# Altium PCB pcb.PcbDoc
Units mm, origin at the board's own origin, x right, y up, seen from the top; angles counter-clockwise.
Board outline 81.53 x 56.15 mm, 2 copper layers (Top Layer, Bottom Layer); 20 components, 17 nets, 115 pads, 0 vias.
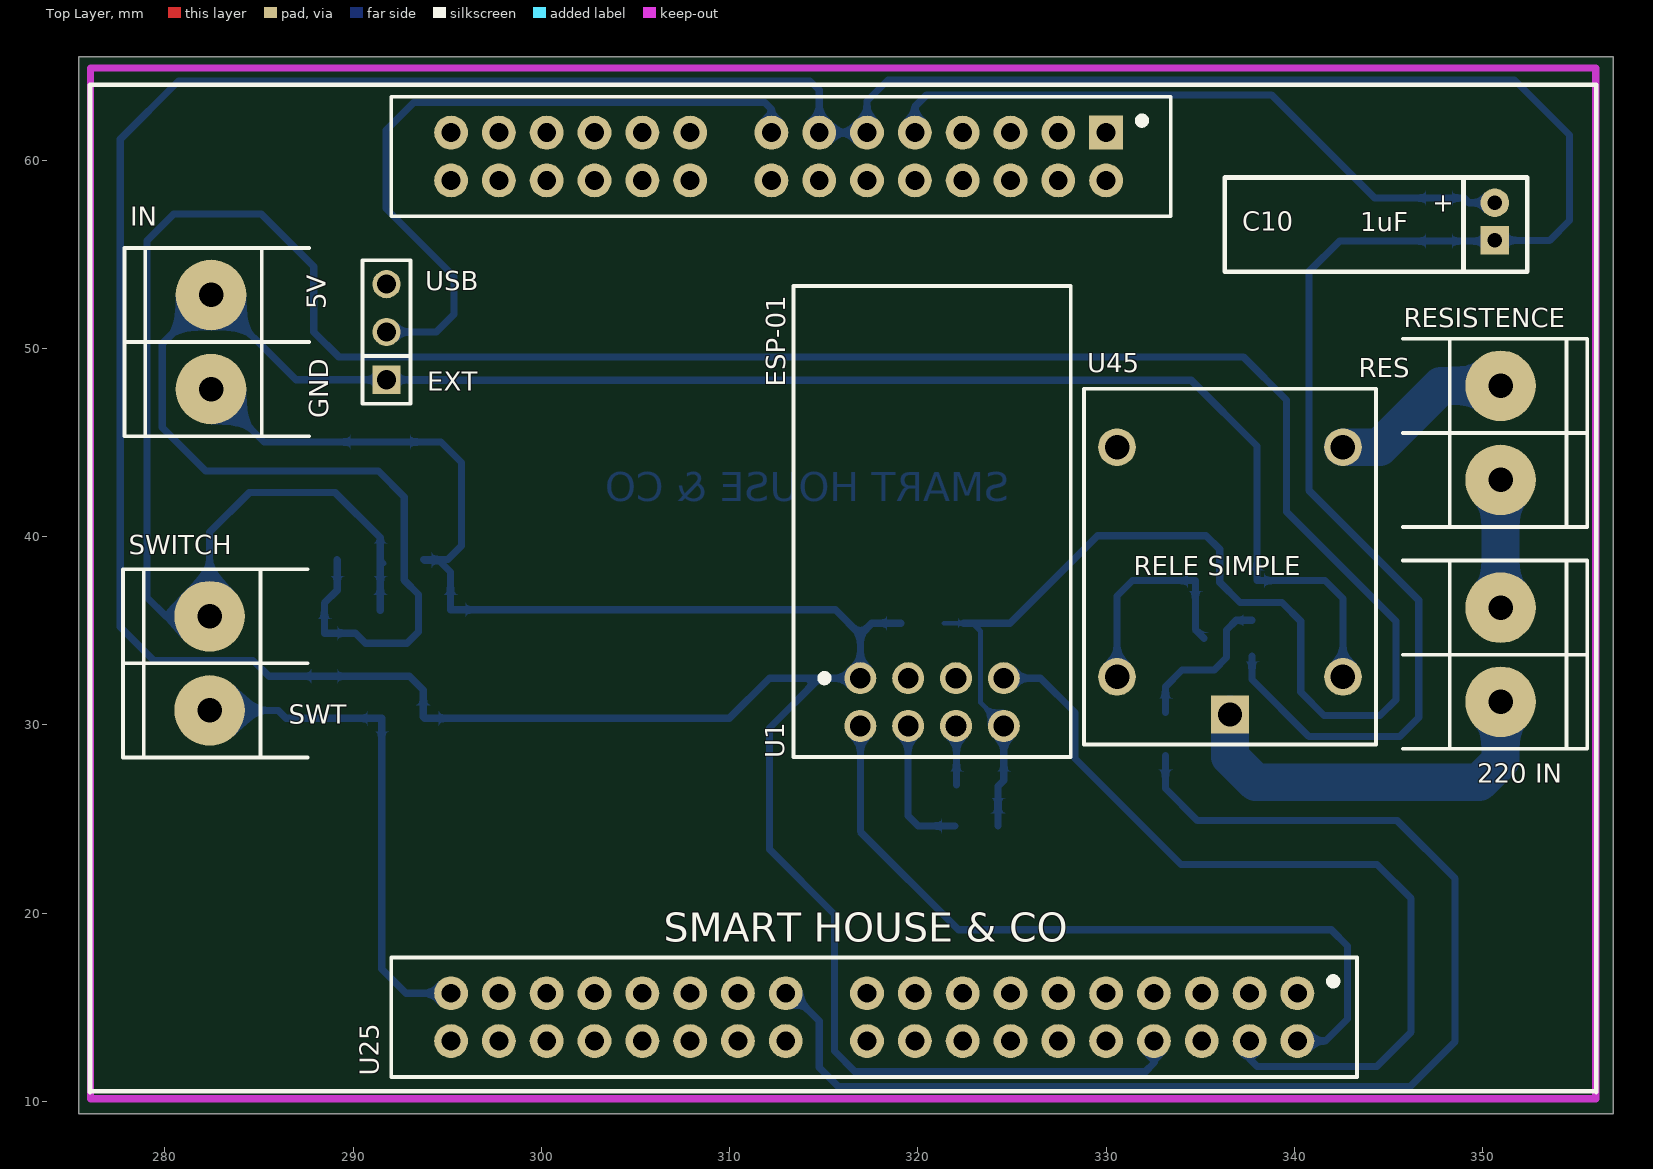
[diagram p0: Top Layer view]
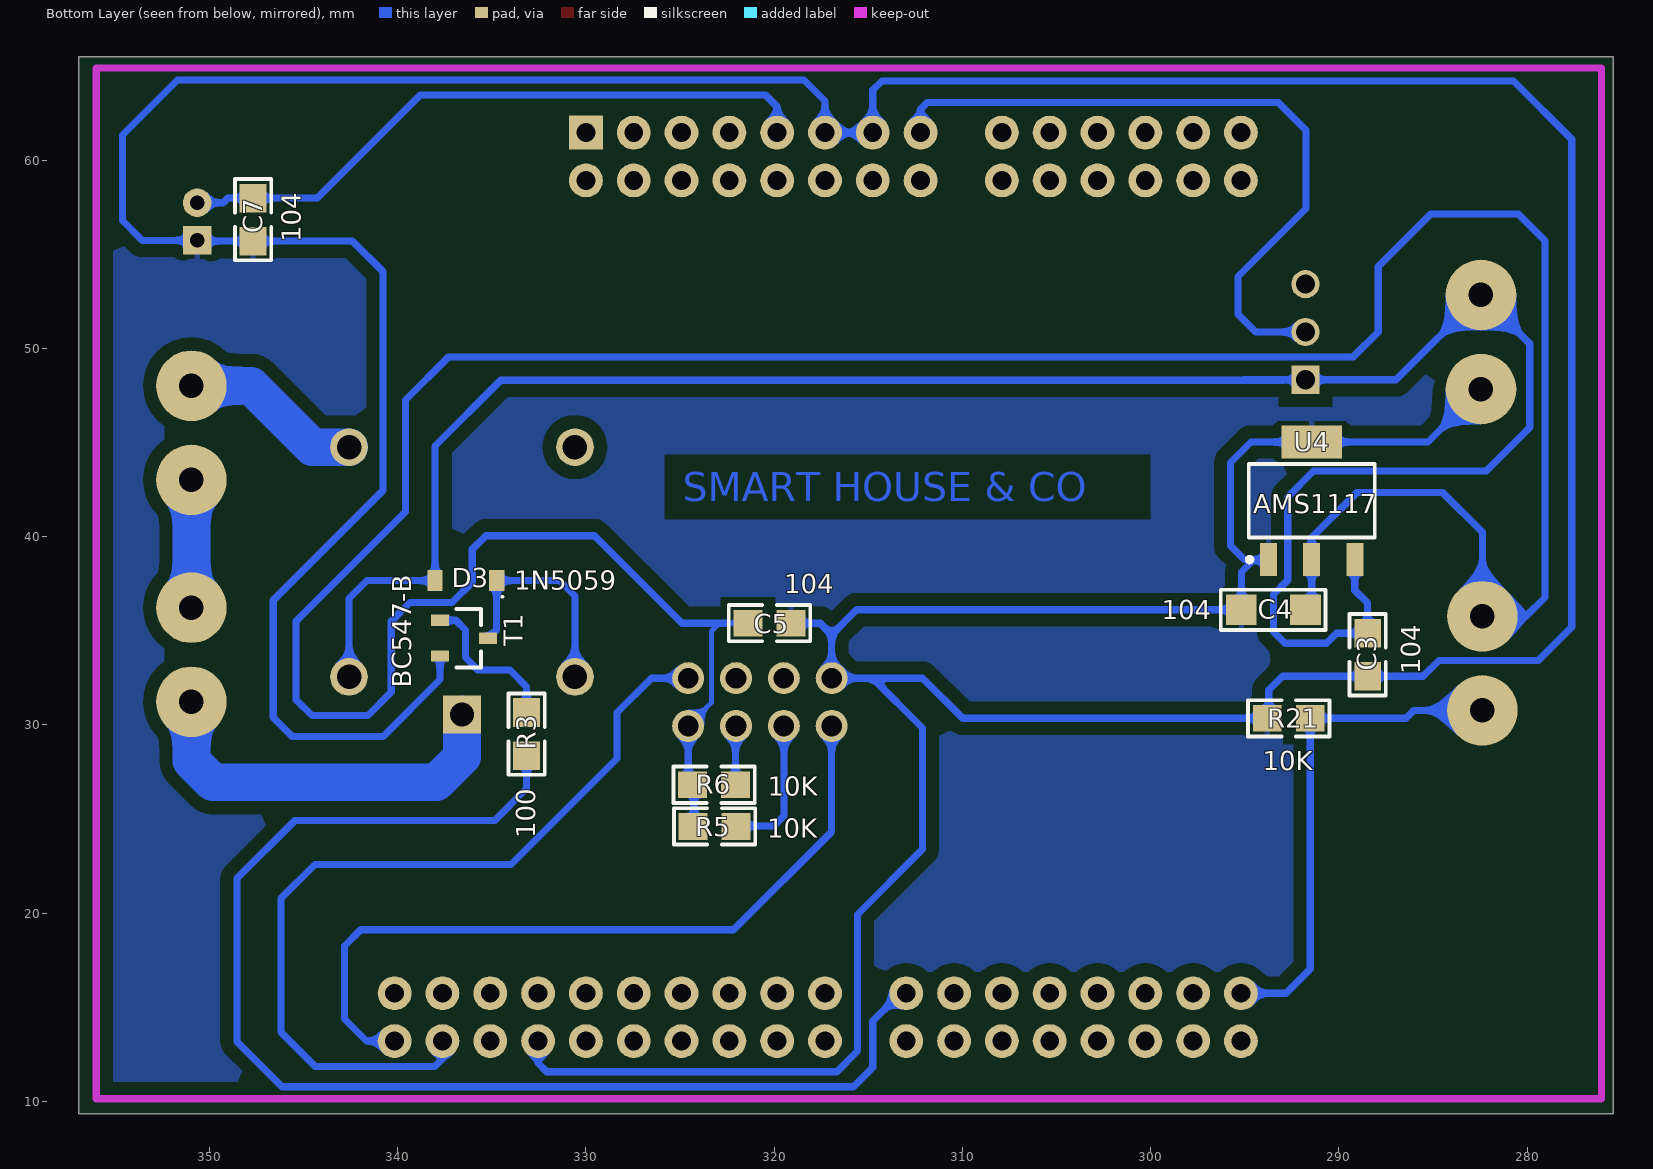
[diagram p1: Bottom Layer view, seen from below]

## Layer stack, top to bottom
Top Solder: solder mask 0.0102, Solder Resist, Dk 3.5
Top Layer: signal copper 0.0356
Dielectric 1: dielectric 0.32, FR-4, Dk 4.8
Bottom Layer: signal copper 0.0356
Bottom Solder: solder mask 0.0102, Solder Resist, Dk 3.5

## Board outline
275.412,9.358 275.412,65.507 356.946,65.507 356.946,9.358

## Design rules (kind name [scope] priority, off if disabled: settings)
Clearance POLYGON [All vs InPolygon] p1: gap=0.7
Clearance [All] p2: gap=0.254
PolygonConnect [All] p1: connectstyle=Relief reliefconductorwidth=0.254 reliefentries=4 polygonreliefangle="90 Angle" airgapwidth=0.254
RoutingVias [All] p1: holewidth=0.711 width=1.27 viastyle="Through Hole" minholewidth=0.711 minwidth=1.27 maxholewidth=0.711 maxwidth=1.27
SolderMaskExpansion [All] p1: expansion=0.102
UnpouredPolygon [All] p1: allowunpoured=FALSE
Width [All] p1: maxlimit=2 minlimit=0.254 preferedwidth=0.381 toplayer_maxwidth=0.508 minimp=50.000000 maximp=50.000000 favimp=50.000000
29 further rules are at their usual default settings.

## Classes and differential pairs
component class esq: C3 C4 C5 C7 C10 D3 R3 R5 R6 R21 T1 U1 U4 U25 U45 ""

## Components (designator, comment, footprint, x,y, rotation, side; value= is the part's Value field where it differs from the comment)
C3 "104" 0805 288.468,33.731 r270 bottom
C4 "104" 1206 293.472,36.119 r0 bottom
C5 "104" 0805 320.243,35.408 r0 bottom
C7 "104" 0805 347.675,56.845 r90 bottom
C10 "1uF" CAP100RP 350.647,56.744 r270 top
D3 "1N5059" Diodo 336.372,37.668 r0 bottom
J1 "RESISTENCE" BORNERA2 350.952,45.517 r180 top
J2 "IN" BORNERA2 282.448,50.343 r0 top
J20 "" JUMPER3 291.77,50.876 r90 top
J21 "SWITCH" BORNERA2 282.372,33.274 r0 top
J26 "220 IN" BORNERA2 350.952,33.731 r180 top
R3 "100" 0805 333.146,29.515 r270 bottom
R5 "10K" 0805 323.164,24.613 r180 bottom
R6 "10K" 0805 323.19,26.822 r180 bottom
R21 "10K" 0805 292.659,30.353 r0 bottom
T1 "BC547-B" SOT23 337.744,35.56 r270 bottom
U1 "ESP-01" ESP-01 316.941,29.947 r0 top
U4 "AMS1117" AMS1117 291.44,41.91 r90 bottom
U25 "FRDM-KL25Z" MICRO 316.154,38.227 r180 top
U45 "RELE SIMPLE" "RELE SERIE 943" 328.828,28.956 r90 top (schematic designator *1)

## Footprints (in the part's own frame and the unit in brackets; to place one, negate y for a bottom-side part, rotate by r counter-clockwise, add the part's x,y. Pads: shape width x height; smd on the part's side, far side on the other; paste and mask are expansions set on the pad)
0805 [mil] "Pasivo 0805"
  rect 60x56 smd: 1(-45,0) 2(45,0)
  silkscreen extent -85,-38 85,38, body extent -39,-25 39,25, height 15
1206 [mil] "Pasivo 1206"
  rect 64x64 smd: 1(-67,0) 2(67,0)
  silkscreen extent -109,-42 110,42, body extent -62,-32 63,31, height 20
AMS1117 [mm] "SOT223, 4-Leads, Body 6,50x7,00mm (avg), Pitch 2,30mm, IPC Medium Density"
  rect 1.75x0.9 smd: 1(-3.125,-2.3) 2(-3.125,2.3) 3(-3.125,0)
  rect 1.75x3.2 smd: 2(3.125,0)
  silkscreen extent -3.25,-3.35 1.95,3.43, body extent -3.48,-3.25 3.48,3.25, height 1.7
BORNERA2 [mm] "Bornera con Tornillos 5mm separaci�n"
  round 3.75 hole 1.3: 1(0,2.5) 2(0,-2.5)
  silkscreen extent -4.6,-5 5.2,5, body extent -3.76,-4.89 3.94,5.61, height 10
CAP100RP [mil] "Body diameter 5mm"
  round 60 hole 30: 1(-39.37,0)
  rect 60x60 hole 30: 2(39.37,0)
  silkscreen extent -92,-565 105,68, body extent -97,-566 107,-65, height 220
Diodo [mm] "SODFL, 2-Leads, Body 1,60x3,60mm, IPC Medium Density"
  rect 0.81x1.12 smd: 1(-1.635,0) 2(1.635,0)
  silkscreen extent -1.99,0.81 -1.89,0.91, body extent -1.4,-0.85 1.4,0.85, height 1.3
ESP-01 [mm]
  round 1.7 hole 1.1: 1(0,2.54) 2(2.54,2.54) 3(5.08,2.54) 4(7.62,2.54) 5(0,0) 6(2.54,0) 7(5.08,0) 8(7.62,0)
  silkscreen extent -3.56,-1.65 11.18,23.37, body extent -3.43,-1.52 11.07,23.28, height 14.88
JUMPER3 [mm]
  rect 1.5x1.5 hole 1.016: 1(-2.54,0)
  round 1.5 hole 1.016: 2(0,0) 3(2.54,0)
  silkscreen extent -3.81,-1.27 3.81,1.27, body extent -3.81,-1.3 3.81,1.27, height 16.15
MICRO [mm]
  rect 1.8x1.8 hole 1: 1(-13.843,-23.241)
  round 1.8 hole 1: 2(-13.843,-20.701) 3(-11.303,-23.241) 4(-11.303,-20.701) 5(-8.763,-23.241) 6(-8.763,-20.701) 7(-6.223,-23.241) 8(-6.223,-20.701) 9(-3.683,-23.241) 10(-3.683,-20.701) 11(-1.143,-23.241) 12(-1.143,-20.701) 13(1.397,-23.241) 14(1.397,-20.701) 15(3.937,-23.241) 16(3.937,-20.701) 17(8.255,-23.241) 18(8.255,-20.701) 19(10.795,-23.241) 20(10.795,-20.701) 21(13.335,-23.241) 22(13.335,-20.701) 23(15.875,-23.241) 24(15.875,-20.701) 25(18.415,-23.241) 26(18.415,-20.701) 27(20.955,-23.241) 28(20.955,-20.701) 29(-24.003,22.479) 30(-24.003,25.019) 31(-21.463,22.479) 32(-21.463,25.019) 33(-18.923,22.479) 34(-18.923,25.019) 35(-16.383,22.479) 36(-16.383,25.019) 37(-13.843,22.479) 38(-13.843,25.019) 39(-11.303,22.479) 40(-11.303,25.019) 41(-8.763,22.479) 42(-8.763,25.019) 43(-6.223,22.479) 44(-6.223,25.019) 45(-3.683,22.479) 46(-3.683,25.019) 47(-1.143,22.479) 48(-1.143,25.019) 49(3.175,22.479) 50(3.175,25.019) 51(5.715,22.479) 52(5.715,25.019) 53(8.255,22.479) 54(8.255,25.019) 55(10.795,22.479) 56(10.795,25.019) 57(13.335,22.479) 58(13.335,25.019) 59(15.875,22.479) 60(15.875,25.019) 61(18.415,22.479) 62(18.415,25.019) 63(20.955,22.479) 64(20.955,25.019)
  silkscreen extent -39.88,-25.78 40.13,27.72, body extent -25.27,-24.51 22.23,26.29, height 1.5
"RELE SERIE 943" [mm]
  round 2 hole 1.3: B1(3.6,-13.75) B2(3.6,-1.75) NA1(15.8,-13.75) NC1(15.8,-1.75)
  rect 2x2 hole 1.3: C1(1.6,-7.75)
  silkscreen extent 0,-15.5 18.9,0
SOT23 [mm]
  rect 0.6x0.95 smd: 1(0,0) 2(0.95,2.55) 3(1.9,0)
  silkscreen extent -0.6,0.87 2.5,2.18, body extent -0.53,-0.25 2.47,2.88, height 1

## Part data
C3 C4 C5 C7: library part CAP, "cap"
C10: library part CAPPOL, "Cap polarizado"
D3: library part "DIODO SCHOTTKY", "Diodo"
J1 J2 J21 J26: library part Bornera_2, "Bornera de 2 pines"
J20: library part JUMPER3
R3 R5 R6 R21: library part RES, "Resistencia"
T1: library part "TRANSISTOR NPN"

## Nets (pads, with @x,y where several pads share a name; then routed paths per layer and width w, separated by ;. In a path a pad name is that pad's centre, name@x,y a point inside that pad or via, vN(x,y) a via of type N, cw(c..) or ccw(c..) an arc to the next point about the centre after c; other vN are vias at no path point)
3V3: C4.1 C5.2 J21.1 R5.1 R6.1 U1.8 U4.3 | length 173.1
  Bottom Layer w0.254: U4.3 U4.3@291.643,38.582 ; C5.2 322.91,35.408 323.33,34.988 323.33,31.178 U1.8
  Bottom Layer w0.381: J21.1@282.107,35.774 280.05,35.774 279.044,36.779 279.044,55.728 280.467,57.15 285.115,57.15 287.909,54.356 287.909,50.876 289.23,49.555 337.287,49.555 339.573,47.269 339.573,41.326 345.389,35.509 345.389,31.344 344.551,30.505 341.579,30.505 340.335,31.75 340.335,35.509 339.344,36.5 337.109,36.5 336.029,37.579 336.029,39.332 335.305,40.056 329.54,40.056 324.891,35.408 322.428,35.408 ; J21.1 282.372,40.234 284.48,42.342 289.052,42.342 291.44,39.954 U4.3 C4.1@291.44,36.093 ; R5.1@324.256,24.638 324.256,26.746 R6.1 324.561,27.051 U1.8
5V: C3.1 D3.2 J2.1 J20.1 U4.1 U45.B1 | length 116.9
  Bottom Layer w0.381: U4.1 289.154,38.771 289.154,37.16 288.468,36.474 C3.1 290.119,34.874 290.652,34.341 292.862,34.341 293.472,34.95 293.472,36.932 292.71,37.694 292.71,42.113 291.338,43.485 282.169,43.485 279.857,45.796 279.857,50.252 J2.1 286.955,48.336 J20.1 295.046,48.336 ; 292.938,48.311 334.518,48.311 338.007,44.822 D3.2 341.63,37.668 342.578,36.72 U45.B1
CALENTADOR: R3.2 U25.49 | length 67.8
  Bottom Layer w0.381: U25.49 313.284,15.748 314.757,14.275 314.757,11.811 315.788,10.78 346.136,10.78 348.539,13.183 348.539,21.844 345.465,24.917 334.848,24.917 333.146,26.619 R3.2
FASE: J26.1 U45.C1 | length 20.8
  Bottom Layer w2: U45.C1 336.578,28.318 337.947,26.949 349.809,26.949 350.952,28.092 J26.1
GND: C3.2 C4.2 C5.1 C7.1 C10.2 J2.2 R21.2 T1.3 U1.1 U4.2 U25.11 U25.13 U25.36 | length 304
  Bottom Layer w0.381: J2.2 285.256,45.035 291.44,45.035 294.665,45.035 295.758,43.942 295.758,39.522 295.02,38.785 293.74,38.785 293.79,38.735 294.564,38.735 295.173,38.125 C4.2 315.62,36.119 316.941,34.798 ; C5.1 317.551,35.408 316.941,34.798 ; U25.36 332.537,12.04 332.08,11.582 316.662,11.582 315.57,12.675 315.57,19.939 312.115,23.393 312.115,29.845 314.757,32.487 ; T1.3 337.744,32.41 340.766,29.388 345.592,29.388 346.608,30.404 346.608,36.627 340.766,42.469 340.766,54.077 342.392,55.702 C7.1 350.606,55.702 C10.2 353.559,55.744 354.609,56.794 354.609,61.341 351.688,64.262 318.414,64.262 317.297,63.144 U25.11 U25.13 314.757,63.729 314.274,64.211 280.721,64.211 277.622,61.112 277.622,35.204 279.4,33.426 284.683,33.426 285.521,32.588 C3.2 292.989,32.588 293.726,31.852 293.726,30.429 R21.2 309.982,30.353 312.115,32.487 314.757,32.487 ; 314.757,32.487 U1.1 316.941,34.798
NetC7_2: C7.2 C10.1 U25.9 | length 34.8
  Bottom Layer w0.381: U25.9 319.837,62.84 320.472,63.475 338.785,63.475 344.272,57.988 C7.2 349.021,57.988 349.266,57.744 C10.1
NetD3_1: D3.1 T1.2 U45.B2 | length 12
  Bottom Layer w0.381: U45.B2 330.578,36.853 331.394,37.668 D3.1 334.737,35.067 T1.2
NetJ1_2: J1.2 U45.NA1 | length 9.7
  Bottom Layer w2: U45.NA1 344.527,44.756 347.788,48.017 J1.2
NetR3_1: R3.1 T1.1 | length 8.3
  Bottom Layer w0.381: R3.1 333.146,32.029 334.035,32.918 335.737,32.918 336.398,33.579 336.398,35.052 336.906,35.56 T1.1
NetR5_2: R5.2 U1.6 | length 7.5
  Bottom Layer w0.381: U1.6 319.481,25.171 320.015,24.638 R5.2@321.97,24.638
NetR6_2: R6.2 U1.7 | length 3.1
  Bottom Layer w0.381: U1.7 322.047,29.921 R6.2
NEUTRO: J1.1 J26.2 | length 6.8
  Bottom Layer w2: J26.2 J1.1
RXD: U1.4 U25.32 | length 45.5
  Bottom Layer w0.381: U1.4 326.517,32.487 328.346,30.658 328.346,28.219 333.976,22.589 344.39,22.589 346.202,20.777 346.202,13.691 344.373,11.862 338.023,11.862 337.617,12.268 U25.32
SWITCH: J21.2 R21.1 U25.63 | length 26.8
  Bottom Layer w0.381: J21.2 286.015,30.774 286.436,30.353 R21.1 291.516,17.043 292.811,15.748 U25.63
TXD: U1.5 U25.30 | length 41
  Bottom Layer w0.381: U1.5 316.941,24.333 322.148,19.126 341.96,19.126 342.824,18.263 342.824,14.376 341.655,13.208 U25.30
USB: J20.3
VDD: J20.2 U25.15 | length 37.7
  Bottom Layer w0.381: J20.2 294.411,50.876 295.351,51.816 295.351,53.823 291.744,57.429 291.744,61.595 293.218,63.068 311.861,63.068 312.217,62.713 U25.15
pads on no net: U1.2 U1.3 U25.1 U25.2 U25.3 U25.4 U25.5 U25.6 U25.7 U25.8 U25.10 U25.12 U25.14 U25.16 U25.17 U25.18 U25.19 U25.20 U25.21 U25.22 U25.23 U25.24 U25.25 U25.26 U25.27 U25.28 U25.29 U25.31 U25.33 U25.34 U25.35 U25.37 U25.38 U25.39 U25.40 U25.41 U25.42 U25.43 U25.44 U25.45 U25.46 U25.47 U25.48 U25.50 U25.51 U25.52 U25.53 U25.54 U25.55 U25.56 U25.57 U25.58 U25.59 U25.60 U25.61 U25.62 U25.64 U45.NC1

## Polygon pours and split planes (outlines as drawn)
GND on Bottom Layer "POLYGON" (solid, remove dead copper, pour order 2): 271.907,70.764 274.752,67.92 356.997,67.92 356.997,9.398 357.378,9.017 356.616,9.779 276.682,9.779

## Keep-outs
Keep-Out Layer:
  lines w0.381: 276.039,10.145 276.039,64.897 356.006,64.897 356.006,10.145 276.089,10.145

## Other copper
Bottom Layer:
  text "SMART HOUSE & CO" at 324.841,41.885 h1.52

## Silkscreen, mask and mechanical layers (free items; w line width, h text height)
Top Overlay:
  text "USB" at 293.827,53.086 h1
  text "5V" at 288.544,52.095 h1 r90
  text "RES" at 343.408,48.463 h1
  text "EXT" at 293.929,47.752 h1
  text "GND" at 288.671,46.304 h1 r90
  text "SWT" at 286.588,30.074 h1
  text "SMART HOUSE & CO" at 306.502,18.491 h1.52
Mechanical 32:
  the board outline again, w0.381

## Text inside footprints (layer, text, board x,y; h text height)
C10: Top Overlay "+" at 347.472,58.268 h1.02 r270